# Altium PCB I2C UART Buffer Module.PcbDoc
Units mm, origin at the board's own origin, x right, y up, seen from the top; angles counter-clockwise.
Board outline 35 x 28 mm, 4 copper layers (L1 - Primary, L2 - GND, L3 - GND, L4 - Secondary), stack 1.57 mm thick; 21 components, 26 nets, 78 pads, 45 vias.
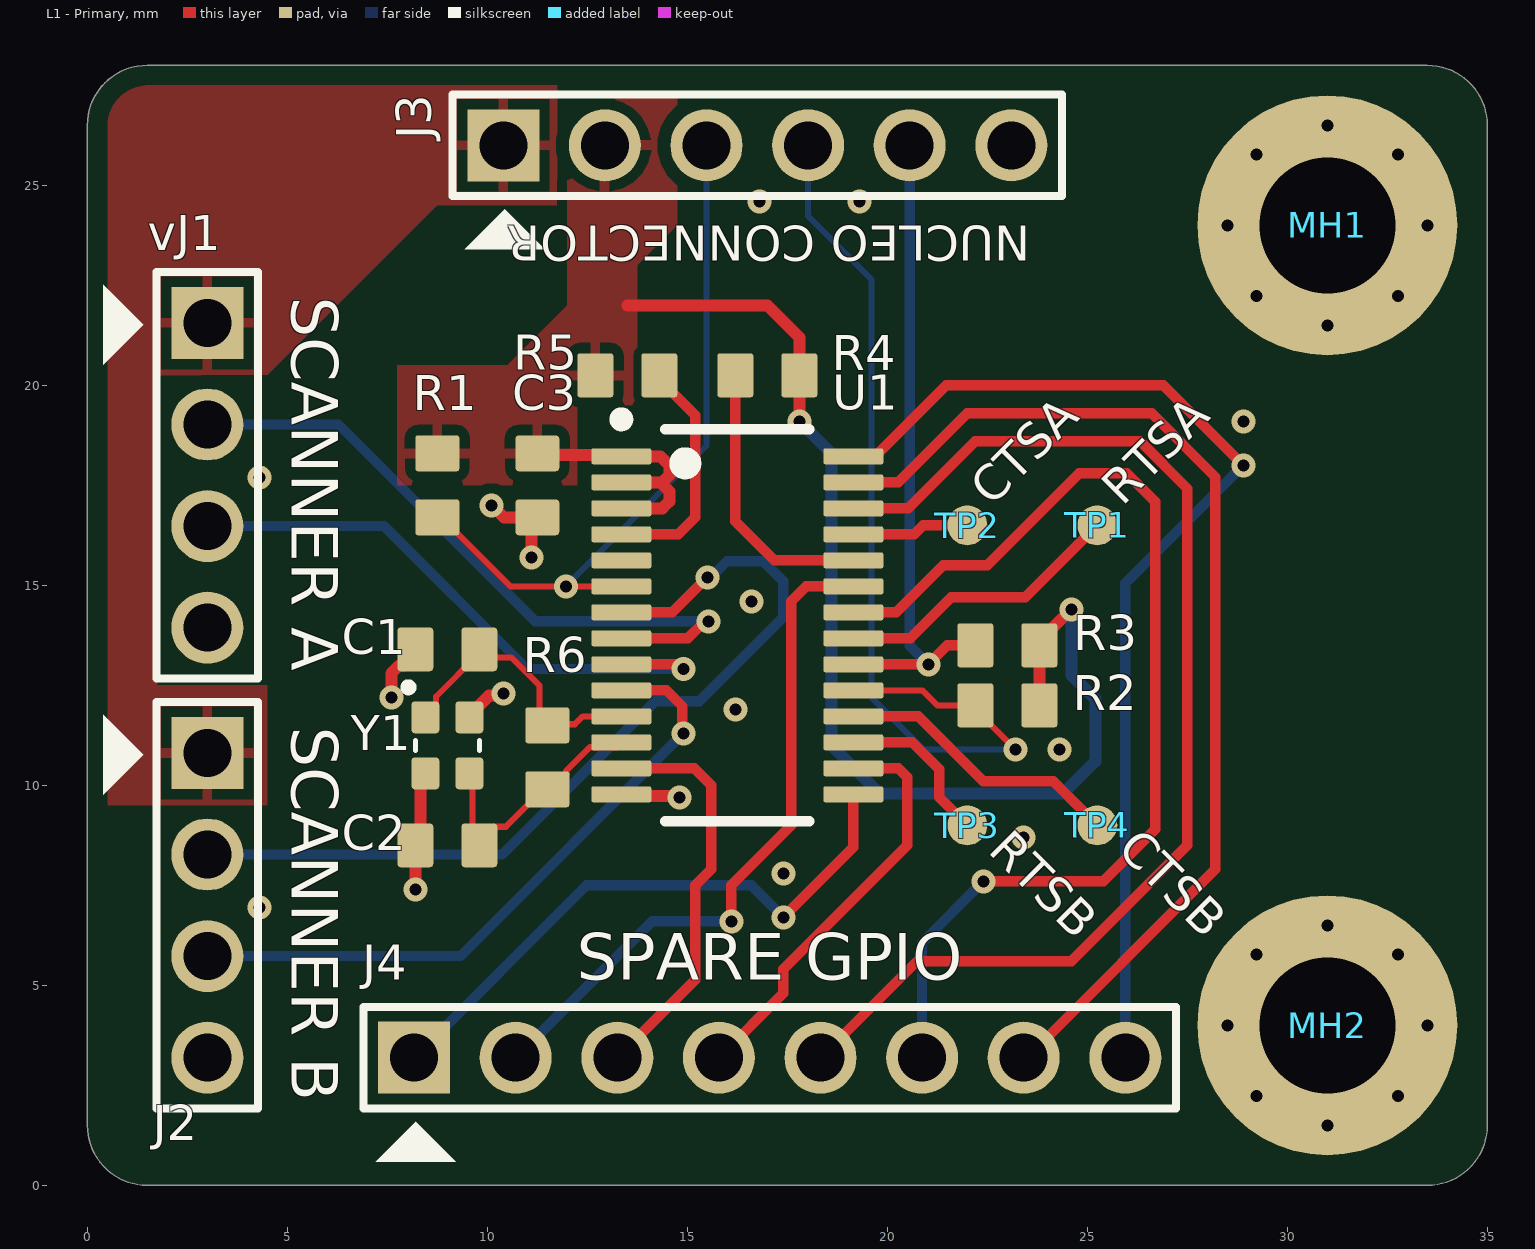
[diagram p0: L1 - Primary view]
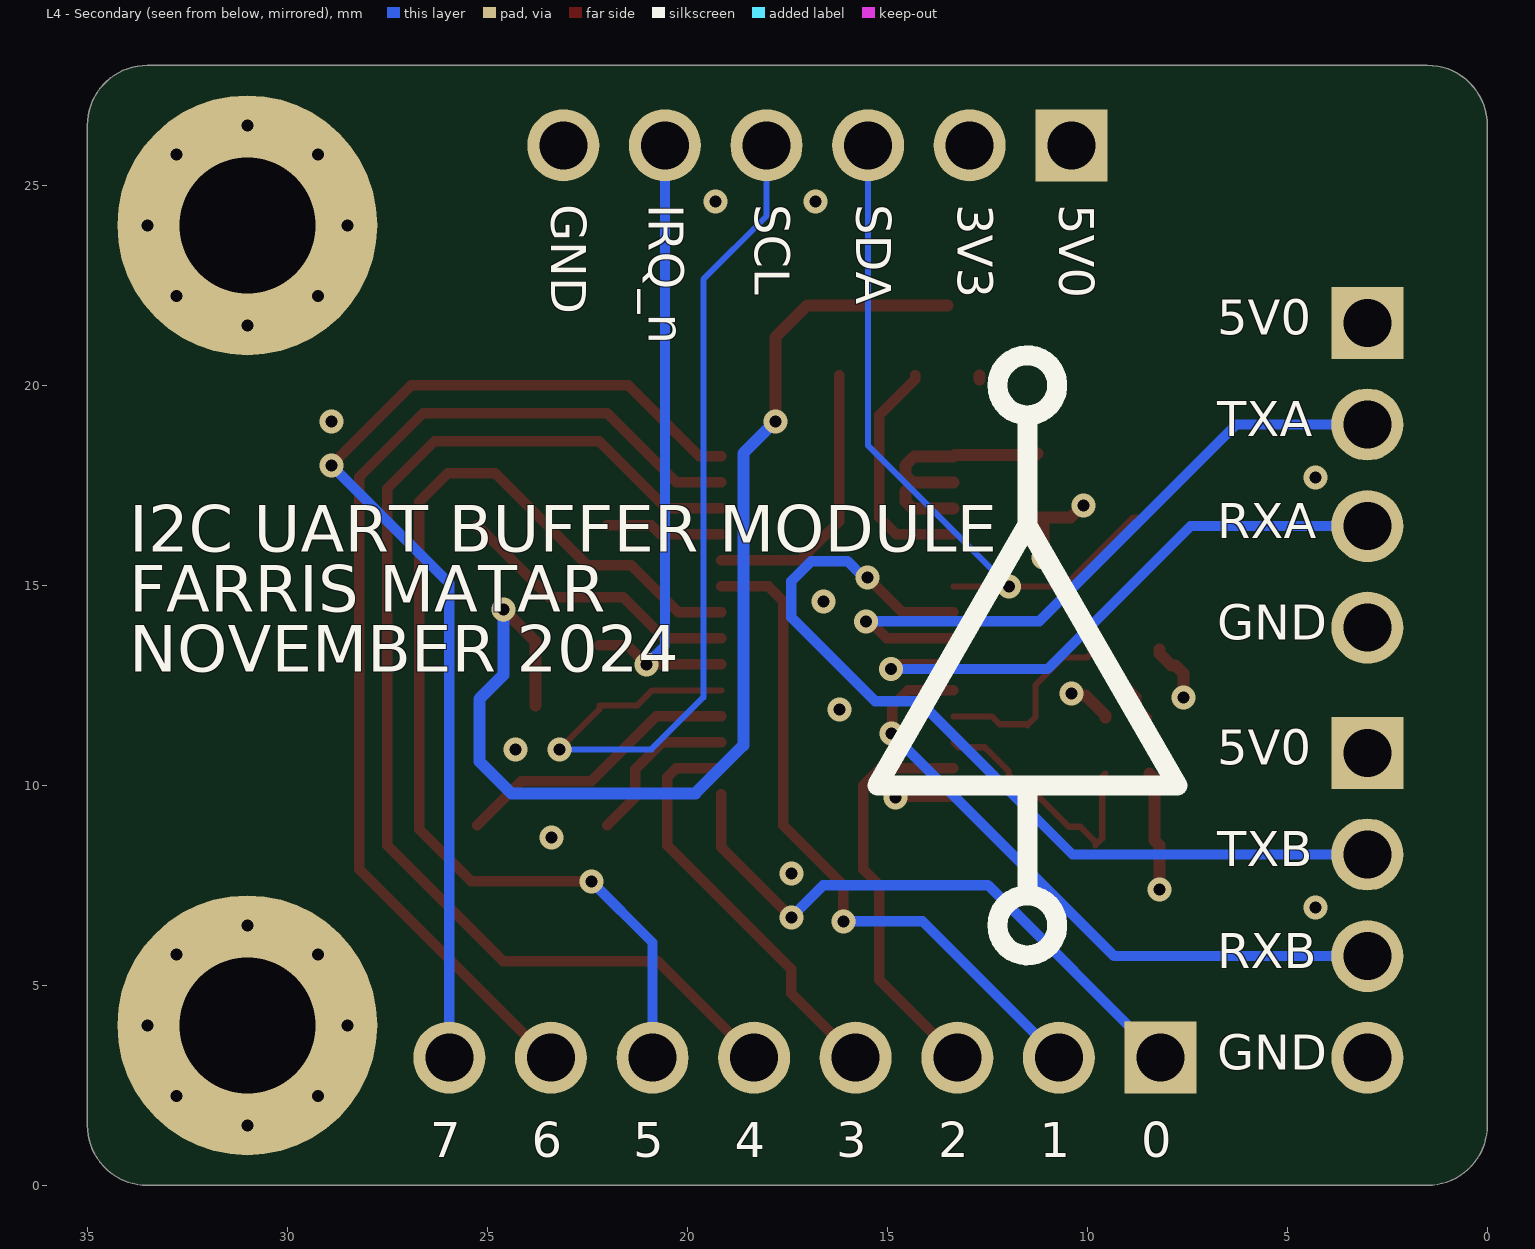
[diagram p1: L4 - Secondary view, seen from below]
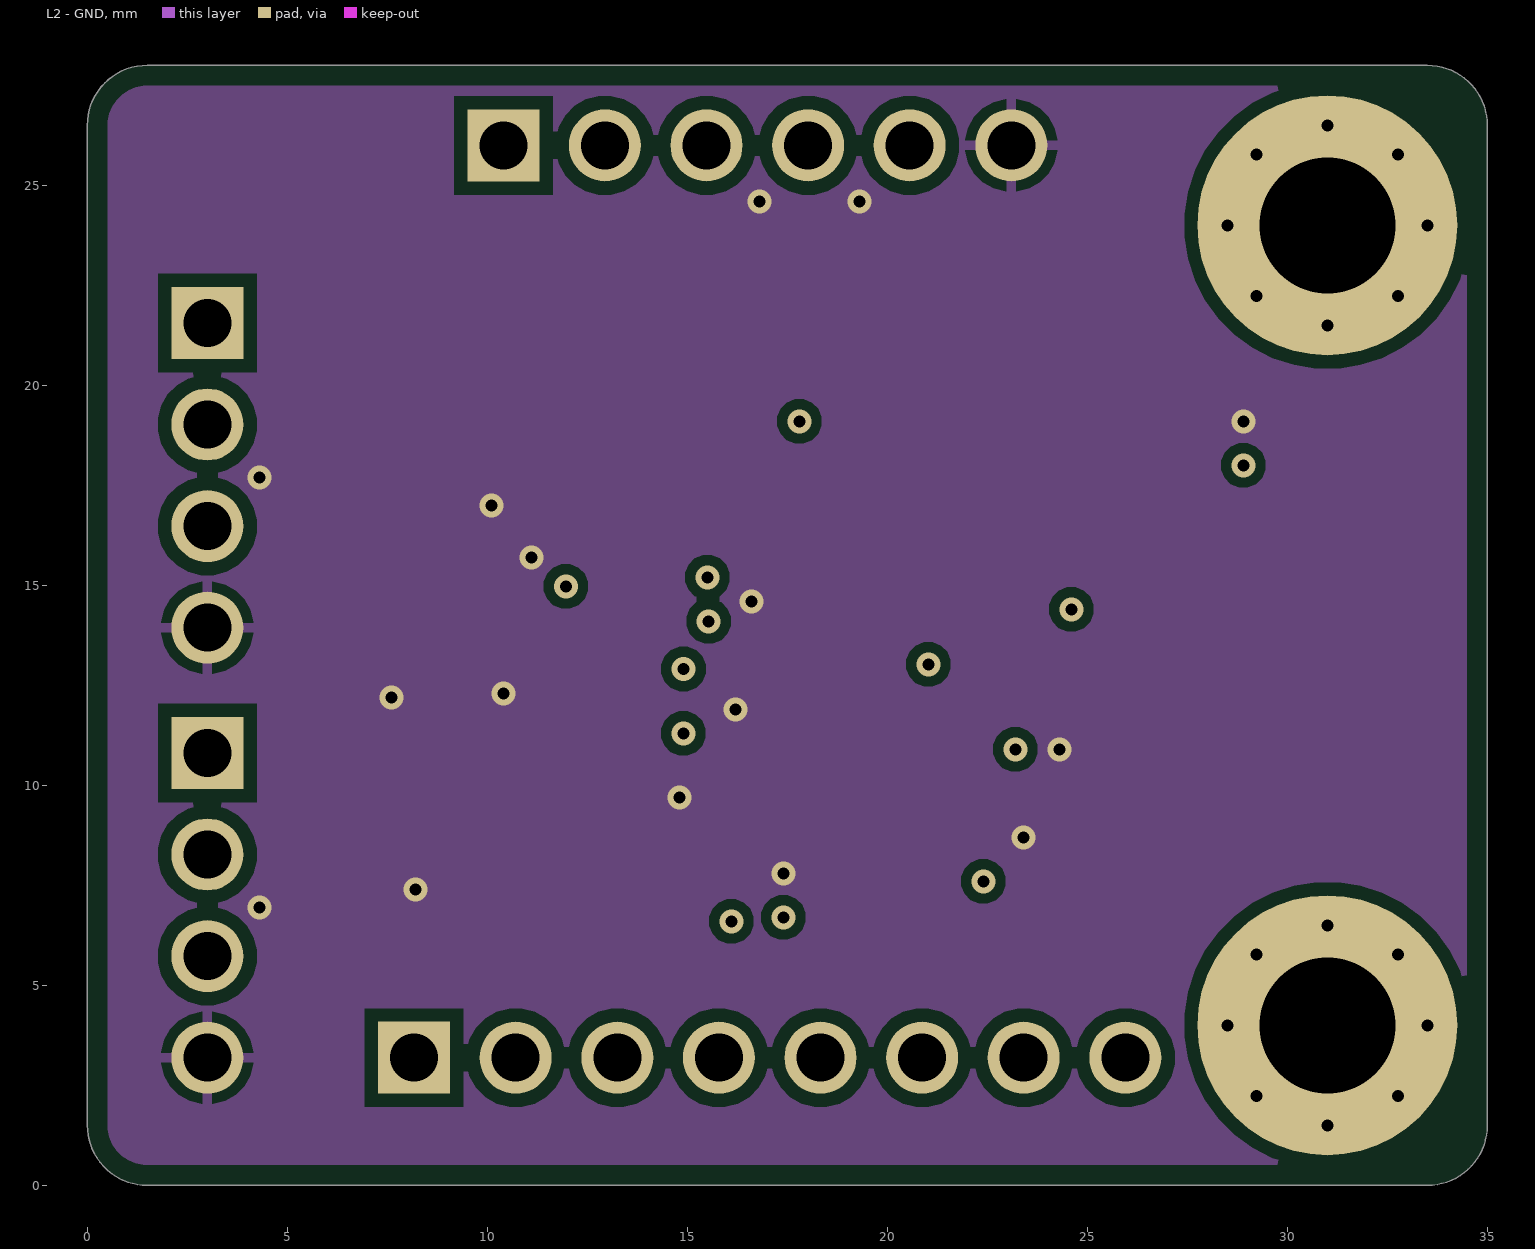
[diagram p2: L2 - GND]
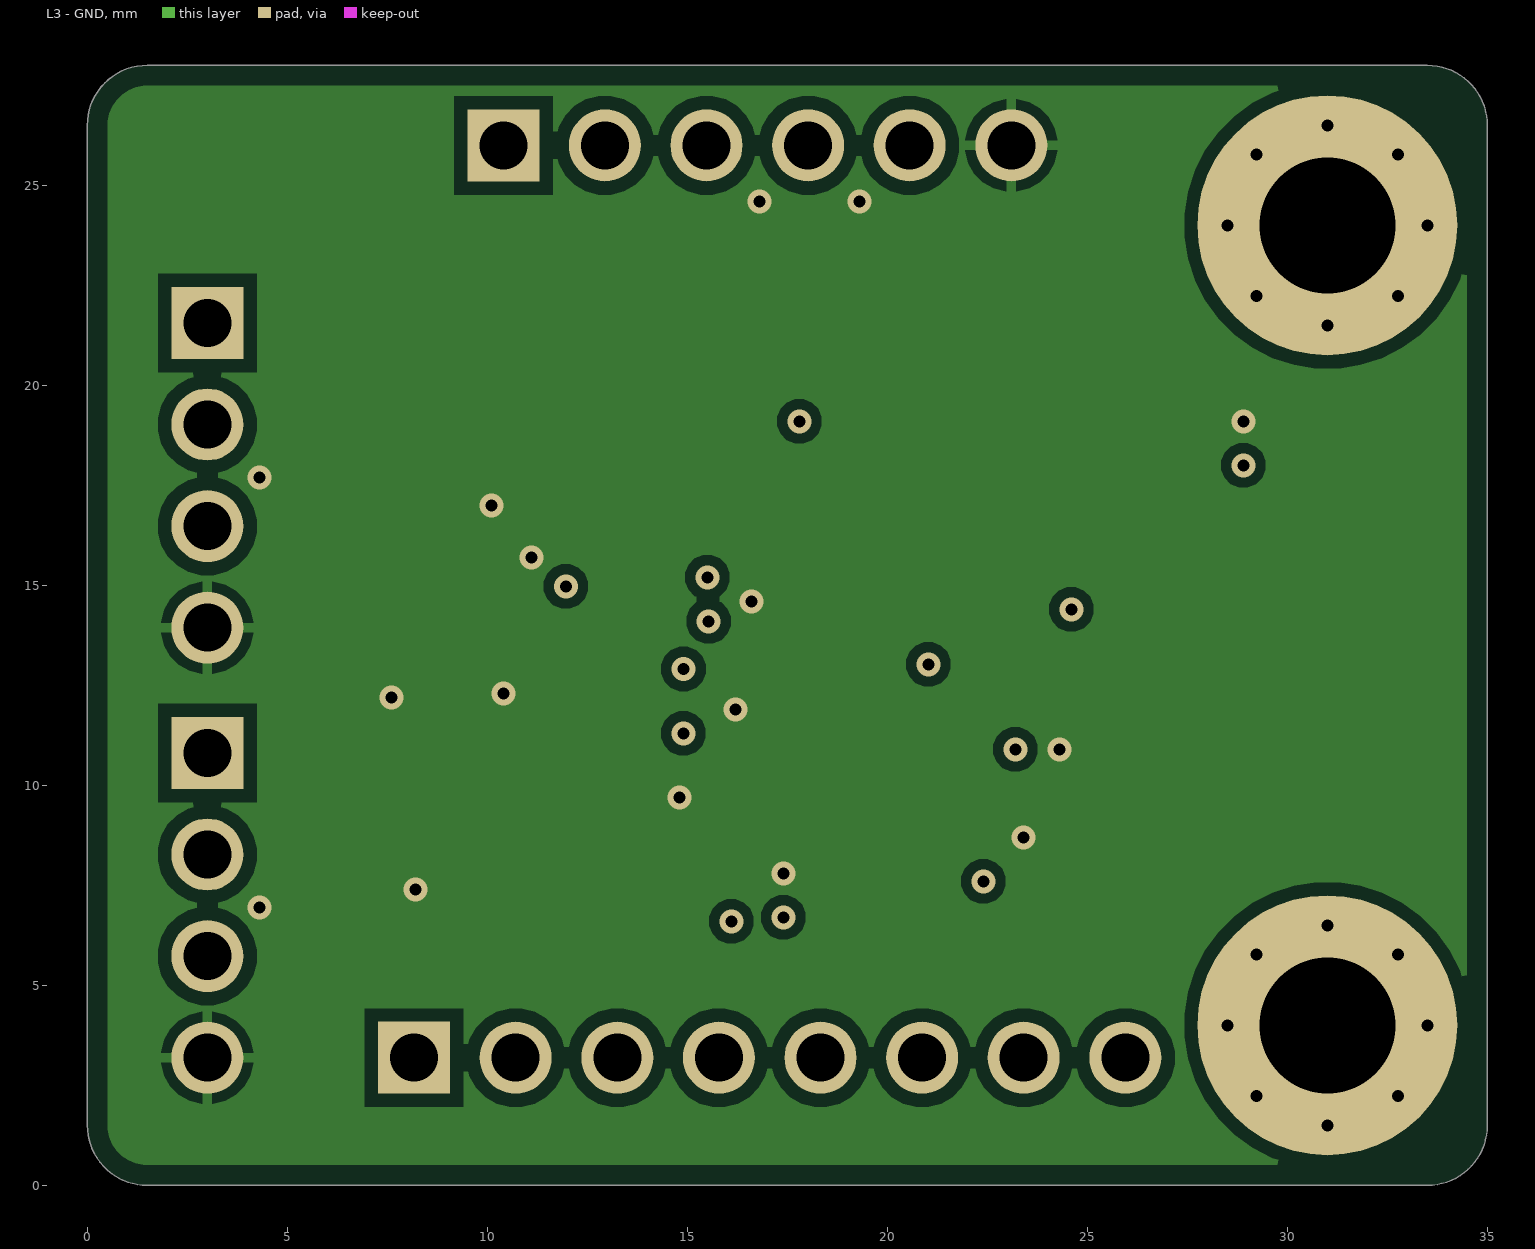
[diagram p3: L3 - GND]
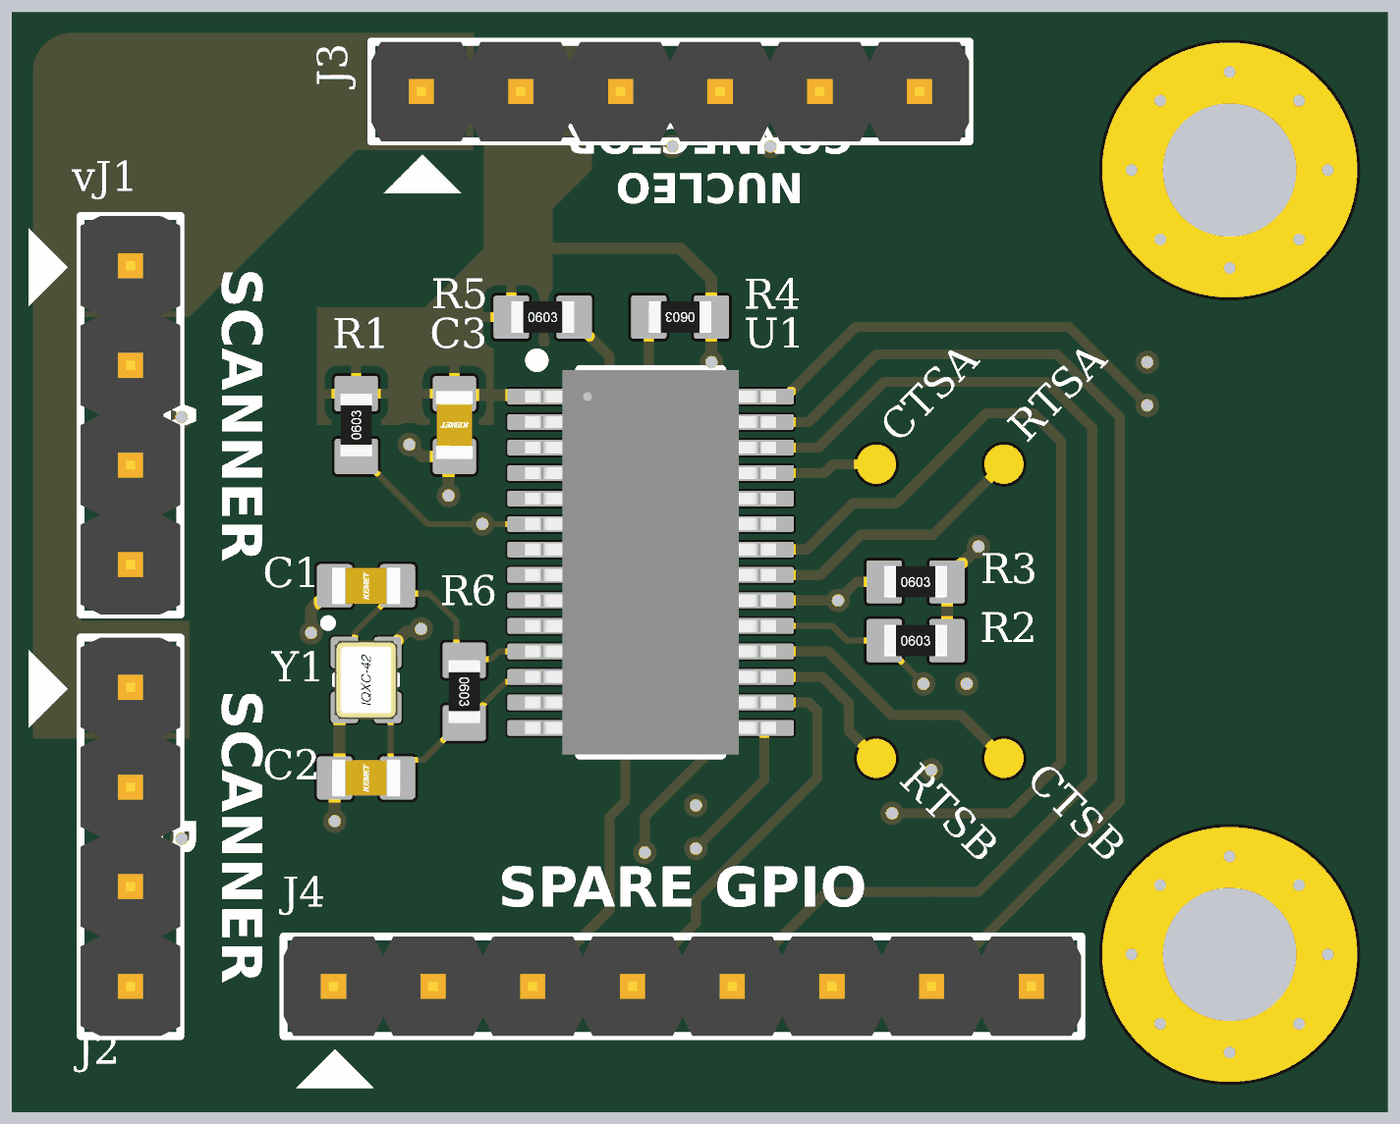
[diagram p4: 3D render of the assembled board from above, using the file's embedded part models]

## Layer stack, top to bottom
Top Solder: solder mask 0.0127, Solder Resist, Dk 3.8
L1 - Primary: signal copper 0.035
Dielectric 1: prepreg 0.2, 7628, Dk 4.6
L2 - GND: signal copper 0.0175
Core: core 1.065, FR-4, Dk 4.5
L3 - GND: signal copper 0.0175
Dielectric 2: prepreg 0.2, 7628, Dk 4.6
L4 - Secondary: signal copper 0.035
Bottom Solder: solder mask 0.0127, Solder Resist, Dk 3.8

## Board outline
0,1.5 ccw(c1.5,1.5) 1.5,0 33.5,0 ccw(c33.5,1.5) 35,1.5 35,26.5 ccw(c33.5,26.5) 33.5,28 1.5,28 ccw(c1.5,26.5) 0,26.5

## Design rules (kind name [scope] priority, off if disabled: settings)
BoardOutlineClearance [All] p1: gap=0.5 ignorepadtopadclearanceinfootprint=FALSE except(0.4: Text-OutlineEdge Text-CavityEdge Text-CutoutEdge Text-SplitBarrior Text-SplitContinuation)
Clearance ClearanceNetTie [HasFootprint('NET_TIE') vs HasFootprint('NET_TIE')] p1: gap=0 ignorepadtopadclearanceinfootprint=FALSE
Clearance ClearanceMidLayer1 [OnLayer('L2 - GND') Or IsVia Or IsThruPin vs OnLayer('L2 - GND')] p2: gap=0.2 ignorepadtopadclearanceinfootprint=FALSE except(0.25: SMDPad-Hole Fill-Hole Poly-Hole Region-Hole Text-Hole; 0.254: Arc-Via Arc-Hole Track-Via Track-Hole Via-Fill Via-Poly Via-Region Fill-Fill Fill-Poly Fill-Region Poly-Poly Poly-Region Region-Region; 0.33: Arc-THPad Track-THPad THPad-Fill THPad-Poly THPad-Region; 0.5: SMDPad-THPad THPad-THPad THPad-Via THPad-Hole Via-Via Via-Hole)
Clearance ClearanceMidLayer2 [OnLayer('L3 - GND') Or IsVia Or IsThruPin vs OnLayer('L3 - GND')] p3: gap=0.2 ignorepadtopadclearanceinfootprint=FALSE except(0.25: SMDPad-Hole Fill-Hole Poly-Hole Region-Hole Text-Hole; 0.254: Arc-Via Arc-Hole Track-Via Track-Hole Via-Fill Via-Poly Via-Region Fill-Fill Fill-Poly Fill-Region Poly-Poly Poly-Region Region-Region; 0.33: Arc-THPad Track-THPad THPad-Fill THPad-Poly THPad-Region; 0.5: SMDPad-THPad THPad-THPad THPad-Via THPad-Hole Via-Via Via-Hole)
Clearance ClearanceTopLayer [OnLayer('L1 - Primary') Or IsVia Or IsThruPin vs OnLayer('L1 - Primary') Or IsVia Or IsThruPin] p4: gap=0.2 ignorepadtopadclearanceinfootprint=FALSE except(0.25: SMDPad-Hole Fill-Hole Poly-Hole Region-Hole Text-Hole; 0.254: Arc-Via Arc-Hole Track-Via Track-Hole Via-Fill Via-Poly Via-Region Fill-Fill Fill-Poly Fill-Region Poly-Poly Poly-Region Region-Region; 0.33: Arc-THPad Track-THPad THPad-Fill THPad-Poly THPad-Region; 0.5: SMDPad-THPad THPad-THPad THPad-Via THPad-Hole Via-Via Via-Hole)
Clearance ClearanceBottomLayer [OnLayer('L4 - Secondary') Or IsVia Or IsThruPin vs OnLayer('L4 - Secondary') Or IsVia Or IsThruPin] p5: gap=0.2 ignorepadtopadclearanceinfootprint=FALSE except(0.25: SMDPad-Hole Fill-Hole Poly-Hole Region-Hole Text-Hole; 0.254: Arc-Via Arc-Hole Track-Via Track-Hole Via-Fill Via-Poly Via-Region Fill-Fill Fill-Poly Fill-Region Poly-Poly Poly-Region Region-Region; 0.33: Arc-THPad Track-THPad THPad-Fill THPad-Poly THPad-Region; 0.5: SMDPad-THPad THPad-THPad THPad-Via THPad-Hole Via-Via Via-Hole)
ComponentClearance [All] p1: gap=0.102 collisioncheckmode=3 verticalgap=0.102 showdistances=TRUE
DiffPairsRouting [All] p1: maxlimit=0.203 minlimit=0.102 mostfreqgap=0.203 toplayer_mingap=0.203 toplayer_minwidth=0.203 toplayer_maxwidth=1816.048 toplayer_prefwidth=0.203 midlayer1_maxgap=0.102 midlayer1_prefgap=0.102 midlayer1_minwidth=0.102 midlayer1_maxwidth=1816.048 midlayer1_prefwidth=0.102 midlayer2_maxgap=0.102 midlayer2_prefgap=0.102 midlayer2_minwidth=0.102 midlayer2_maxwidth=1816.048 midlayer2_prefwidth=0.102 bottomlayer_mingap=0.203 bottomlayer_minwidth=0.203 bottomlayer_maxwidth=1816.048 bottomlayer_prefwidth=0.203 maxuncoupledlength=12.7
Height [All] p1: minheight=0 maxheight=1816.048 prefheight=12.7
HoleSize [All] p1: absolutevalues=TRUE maxlimit=6.3 minlimit=0.2 maxpercent=80.000 minpercent=20.000
HoleToHoleClearance [All] p1: gap=0.25 allowstackedmicrovias=FALSE
MinimumAnnularRing [All] p1: minimumring=0.076
MinimumSolderMaskSliver [All] p1: minsoldermaskwidth=0.1
PolygonConnect PolygonConnect_1 [HasFootprint('TESTPOINT_CIRCLE_1MM') OR HasFootprint('TESTPOINT_SQUARE_1MM')] p1: connectstyle=Direct reliefconductorwidth=0.254 reliefentries=4 polygonreliefangle="90 Angle" airgapwidth=0.254
PolygonConnect [All] p2: thpad.connectstyle=Relief thpad.reliefconductorwidth=0.254 thpad.reliefentries=4 thpad.polygonreliefangle="90 Angle" thpad.airgapwidth=0.254 smdpad.connectstyle=Relief smdpad.reliefconductorwidth=0.254 smdpad.reliefentries=4 smdpad.polygonreliefangle="90 Angle" smdpad.airgapwidth=0.254 via.connectstyle=Direct via.reliefconductorwidth=0.254 via.reliefentries=4 via.polygonreliefangle="90 Angle" via.airgapwidth=0.254
RoutingVias [All] p1: holewidth=0.3 width=0.6 viastyle="Through Hole" minholewidth=0.2 minwidth=0.45 maxholewidth=6.3 maxwidth=6.55
ShortCircuit ShortCircuitNetTie [InNet('CELL_V0') vs InNet('VBAT-')] p1: allowed=TRUE
ShortCircuit [All] p2: allowed=FALSE
SilkToSilkClearance [All] p1: silktosilkclearance=0
SilkToSolderMaskClearance [IsPad] p1: minsilkscreentomaskgap=0.102 clearancetoexposedcopper=TRUE
SolderMaskExpansion [All] p1: expansion=0.075 istentingtop=FALSE
SupplyNets "Schematic Supply Nets_2" [InNet('5V0')] p1: voltage=0.000
SupplyNets "Schematic Supply Nets_1" [InNet('GND')] p2: voltage=0.000
SupplyNets "Schematic Supply Nets" [InNet('3V3')] p3: voltage=0.000
Width [All] p1: maxlimit=1816.048 minlimit=0.152 preferedwidth=0.254
21 further rules are at their usual default settings.

## Classes and differential pairs
component class "Buffer Module": C1 C2 C3 J2 J3 J4 MH1 MH2 R3 R4 R5 R6 TP1 TP2 TP3 TP4 U1 vJ1 Y1

## Components (designator, comment, footprint, x,y, rotation, side; value= is the part's Value field where it differs from the comment)
C1 "CAP_12pF_50V_0603" CAP0603 9,13.4 r0 top value=12pF
C2 "CAP_12pF_50V_0603" CAP0603 9,8.5 r0 top value=12pF
C3 "CAP_0.1uF_16V_0603" CAP0603 11.25,17.5 r90 top value=0.1μF
J2 "HEADER 4x1" HDR1X4 3,7 r270 top
J3 "HEADER 6x1" HDR1X6 16.75,26 r0 top
J4 "HEADER 8x1" HDR1X8 17.06,3.19 r0 top
MH1 "MOUNTING_HOLE_M3" MOUNTING_HOLE_3mm 31,24 r0 top
MH2 "MOUNTING_HOLE_M3" MOUNTING_HOLE_3mm 31,4 r0 top
R1 "RES_1.8kΩ_0603_1%" RES0603 8.75,17.5 r90 top value=1.8kΩ
R2 "RES_1.8kΩ_0603_1%" RES0603 23,12 r0 top value=1.8kΩ
R3 "RES_10kΩ_0603_1%" RES0603 23,13.5 r0 top value=10kΩ
R4 "RES_10kΩ_0603_1%" RES0603 17,20.25 r180 top value=10kΩ
R5 "RES_10kΩ_0603_1%" RES0603 13.5,20.25 r0 top value=10kΩ
R6 "RES_1MΩ_0603_1%" RES0603 11.5,10.7 r270 top value=1MΩ
TP1 "TESTPOINT_1MM_CIRCLE" TESTPOINT_CIRCLE_1MM 25.25,16.5 r270 top
TP2 "TESTPOINT_1MM_CIRCLE" TESTPOINT_CIRCLE_1MM 22,16.5 r270 top
TP3 "TESTPOINT_1MM_CIRCLE" TESTPOINT_CIRCLE_1MM 22,9 r90 top
TP4 "TESTPOINT_1MM_CIRCLE" TESTPOINT_CIRCLE_1MM 25.25,9 r90 top
U1 "XR20M1172IG28-F" MAX_28-TSSOP 16.25,14 r0 top
vJ1 "HEADER 4x1" HDR1X4 3,17.75 r270 top (schematic designator J1)
Y1 "CRYSTAL_25MHZ" XTAL_KYOCERA_CX2016SA 9,11 r270 top

## Footprints (in the part's own frame and the unit in brackets; to place one, negate y for a bottom-side part, rotate by r counter-clockwise, add the part's x,y. Pads: shape width x height; smd on the part's side, far side on the other; paste and mask are expansions set on the pad)
CAP0603 [mm]
  rrect20% 0.9x1.1 smd: 1(-0.8,0) 2(0.8,0)
  body extent -0.88,-0.48 0.87,0.47, height 0.87
HDR1X4 [mm] "Connector; Header; 4 Position"
  rect 1.8x1.8 hole 1.2: 1(-3.81,0)
  round 1.8 hole 1.2: 2(-1.27,0) 3(1.27,0) 4(3.81,0)
  silkscreen extent -5.08,-2.6 5.08,1.27, body extent -5.08,-1.27 5.08,1.27, height 8.55
HDR1X6 [mm] "Connector; Header; 6 Position"
  rect 1.8x1.8 hole 1.2: 1(-6.35,0)
  round 1.8 hole 1.2: 2(-3.81,0) 3(-1.27,0) 4(1.27,0) 5(3.81,0) 6(6.35,0)
  silkscreen extent -7.62,-2.6 7.62,1.27, body extent -7.62,-1.27 7.62,1.27, height 8.57
HDR1X8 [mm] "Connector; Header; 8 Position"
  rect 1.8x1.8 hole 1.2: 1(-8.89,0)
  round 1.8 hole 1.2: 2(-6.35,0) 3(-3.81,0) 4(-1.27,0) 5(1.27,0) 6(3.81,0) 7(6.35,0) 8(8.89,0)
  silkscreen extent -10.16,-2.6 10.16,1.27, body extent -10.16,-1.27 10.16,1.27, height 8.55
MAX_28-TSSOP [mm]
  rrect25% 1.5x0.4 smd mask+0.05: 1(-2.9,4.225) 2(-2.9,3.575) 3(-2.9,2.925) 4(-2.9,2.275) 5(-2.9,1.625) 6(-2.9,0.975) 7(-2.9,0.325) 8(-2.9,-0.325) 9(-2.9,-0.975) 10(-2.9,-1.625) 11(-2.9,-2.275) 12(-2.9,-2.925) 13(-2.9,-3.575) 14(-2.9,-4.225) 15(2.9,-4.225) 16(2.9,-3.575) 17(2.9,-2.925) 18(2.9,-2.275) 19(2.9,-1.625) 20(2.9,-0.975) 21(2.9,-0.325) 22(2.9,0.325) 23(2.9,0.975) 24(2.9,1.625) 25(2.9,2.275) 26(2.9,2.925) 27(2.9,3.575) 28(2.9,4.225)
  silkscreen extent -3.05,-4.9 1.8,5.3, body extent -3.2,-4.9 3.2,4.9, height 1.2
MOUNTING_HOLE_3mm [mm] "3mm Hole"
  round 6.5 hole 3.4: 0(0,0)
RES0603 [mm] "Chip Resistor, Body 1.6x0.8mm, IPC Medium Density"
  rrect15% 0.9x1.1 smd: 1(-0.8,0) 2(0.8,0)
  body extent -0.8,-0.4 0.8,0.4, height 0.46
TESTPOINT_CIRCLE_1MM [mm]
  round 1 smd paste-2539.97: 1(0,0)
XTAL_KYOCERA_CX2016SA [mm]
  rrect25% 0.8x0.7 smd mask+0.05: 1(-0.7,-0.55) 2(0.7,-0.55) 3(0.7,0.55) 4(-0.7,0.55)
  silkscreen extent -1.55,-1.07 0.13,0.8, body extent -1,-0.8 1,0.8, height 0.49

## Part data
C1 C2: "CAP CER 12PF 50V C0G/NP0 0603", Dielectric="C0G, NP0", Manufacturer 1=KEMET, Manufacturer Part Number 1=C0603C120J5GACTU, Package/Footprint=0603, Supplier Part Number 1=399-C0603C120J5GACTUCT-ND, Voltage Rating=50V, Mounting Type=SMD, Supplier 1=Digi-Key
C3: "CAP CER 0.1UF 16V X7R 0603", Dielectric=X7R, Manufacturer 1=Yageo, Manufacturer Part Number 1=CC0603KRX7R7BB104, Package=0603, Supplier Part Number 1=311-1088-1-ND, Voltage Rating=16V, Supplier 1=Digi-Key
J2 vJ1: "CONN HEADER VERT 4POS 2.54MM", Manufacturer 1="Würth Elektronik", Manufacturer Part Number 1=61300411121, Supplier Part Number 1=732-5317-ND, Mounting Type=TH, Pitch=2.54mm, Supplier 1=Digikey
J3: "CONN HEADER VERT 6POS 2.54MM", Manufacturer 1="Würth Elektronik", Manufacturer Part Number 1=61300611121, Supplier Part Number 1=732-5319-ND, Mounting Type=TH, Pitch=2.54mm, Supplier 1=Digi-Key
J4: "CONN HEADER VERT 8POS 2.54MM", Manufacturer 1="Würth Elektronik", Manufacturer Part Number 1=61300811121, Supplier Part Number 1=732-5321-ND, Mounting Type=TH, Pitch=2.54mm, Supplier 1=Digikey
R1 R2: "RES 1.8K OHM 1% 1/10W 0603", Manufacturer 1=Yageo, Manufacturer Part Number 1=RC0603FR-071K8L, Package=0603, Supplier Part Number 1=311-1.80KHRCT-ND, Supplier 1=Digikey
R3 R4 R5: "RES 10K OHM 1% 1/8W 0603", Manufacturer 1="Stackpole Electronics Inc", Manufacturer Part Number 1=RNCP0603FTD10K0, Package=0603, Supplier Part Number 1=RNCP0603FTD10K0CT-ND, Mounting Type=SMD, Supplier 1=Digi-Key
R6: "RES 1M OHM 1% 1/10W 0603", Manufacturer 1=YAGEO, Manufacturer Part Number 1=RC0603FR-071ML, Package=0603, Supplier Part Number 1=311-1.00MHRCT-ND, Mounting Type=SMD, Supplier 1=Digi-Key
TP1 TP2 TP3 TP4: "TESTPOINT 1MM CIRCLE"
U1: "IC UART FIFO I2C/SPI 64B 28TSSOP", Manufacturer 1="MaxLinear, Inc.", Supplier Part Number 1=1016-1298-5-ND, Manufacturer Part Number 1=XR20M1172IG28-F, Supplier 1=Digikey
Y1: library part CRYSTAL_24MHZ_8PF, "2.0MM X 1.6MM CRYSTAL 24MHZ 8PF", Frequency=24MHz, Load Capacitance=8pF, Manufacturer 1="Kyocera AVX", Manufacturer Part Number 1=CX2016SA24000D0HLLG3, Package/Footprint=SMD, Supplier Part Number 1=478-CX2016SA24000D0HLLG3CT-ND, Mounting Type=SMD, Supplier 1=Digikey

## Via types
v1: diameter 0.6, hole 0.3, L1 - Primary to L4 - Secondary, tented both sides, 45 vias

## Nets (pads, with @x,y where several pads share a name; then routed paths per layer and width w, separated by ;. In a path a pad name is that pad's centre, name@x,y a point inside that pad or via, vN(x,y) a via of type N, cw(c..) or ccw(c..) an arc to the next point about the centre after c; other vN are vias at no path point)
3V3: C3.2 J3.2 R1.2 R2.2 R3.2 R4.1 R5.1 U1.1 U1.2 U1.3 | length 36.2
  L1 - Primary w0.3: C3.2 11.288,18.262 13.313,18.262 U1.1 14.325,18.225 14.551,17.999 14.551,17.751 14.375,17.575 ; R5.1@12.7,20.15 R5.1 ; U1.3 14.375,16.925 14.551,17.101 14.551,17.349 14.325,17.575 U1.2 ; 13.5,22 17,22 17.8,21.2 R4.1 v1(17.8,19.1) ; R2.2 23.8,13.6 v1(24.6,14.4)
  L4 - Secondary w0.3: v1(17.8,19.1) 18.6,18.3 18.6,11 19.8,9.8 24.4,9.8 25.2,10.6 25.2,12.159 24.6,12.759 v1(24.6,14.4)
5V0: J2.1 J3.1 vJ1.1
CTSA_n: TP2.1 U1.25 | length 2.9
  L1 - Primary w0.254: U1.25 20.675,16.275 20.9,16.5 TP2.1
CTSB_n: TP4.1 U1.18 | length 7.2
  L1 - Primary w0.254: U1.18 20.775,11.725 22.4,10.1 24.15,10.1 TP4.1
GND: C1.1 C2.1 C3.1 J2.4 J3.6 U1.14 vJ1.4 Y1.2 Y1.4 | length 9.5
  L1 - Primary w0.3: v1(7.6,12.2) 7.6,12.8 7.8,13 7.9,13 8.2,13.3 C1.1 ; v1(8.2,7.4) C2.1 8.325,8.625 8.325,10.175 Y1.2 ; Y1.4 9.55,11.75 10.043,12.243 10.343,12.243 v1(10.4,12.3) ; v1(10.1,17) 10.114,17 10.414,16.7 C3.1 11.1,16.55 v1(11.1,15.7) ; U1.14 13.388,9.738 14.762,9.738 v1(14.8,9.7)
  other v1: 4.3,6.95 17.4,7.8 23.4,8.7 24.3,10.9 16.2,11.9 16.6,14.6 4.3,17.7 28.9,19.1 16.8,24.6 19.3,24.6
GPIO0: J4.1 U1.15 | length 15.1
  L1 - Primary w0.254: v1(17.4,6.7) 19.15,8.45 U1.15
  L4 - Secondary w0.254: J4.1 12.48,7.5 16.6,7.5 v1(17.4,6.7)
GPIO1: J4.2 U1.23 | length 17.1
  L1 - Primary w0.254: v1(16.1,6.6) 16.1,7.5 17.6,9 17.6,14.6 17.975,14.975 U1.23
  L4 - Secondary w0.254: J4.2 14.12,6.6 v1(16.1,6.6)
GPIO2: J4.3 U1.13 | length 10.2
  L1 - Primary w0.254: J4.3 15.2,5.14 15.2,7.5 15.6,7.9 15.6,10 15.175,10.425 U1.13
GPIO3: J4.4 U1.16 | length 10.4
  L1 - Primary w0.254: J4.4 17.4,4.8 17.4,5.4 20.5,8.5 20.5,10.2 20.275,10.425 U1.16
GPIO4: J4.5 U1.26 | length 29.8
  L1 - Primary w0.254: J4.5 20.74,5.6 24.6,5.6 27.5,8.5 27.5,17.42 26.32,18.6 22.2,18.6 20.525,16.925 U1.26
GPIO5: J4.6 U1.22 | length 27.4
  L1 - Primary w0.254: U1.22 20.225,14.325 21.4,15.5 22.5,15.5 24.8,17.8 25.989,17.8 26.7,17.089 26.7,8.9 25.4,7.6 v1(22.4,7.6)
  L4 - Secondary w0.254: J4.6 20.87,6.07 v1(22.4,7.6)
GPIO6: J4.7 U1.27 | length 27
  L1 - Primary w0.254: U1.27 20.275,17.575 22,19.3 26.61,19.3 28.2,17.71 28.2,7.9 23.49,3.19 J4.7
GPIO7: J4.8 U1.28 | length 27.3
  L1 - Primary w0.254: U1.28 19.7,18.225 21.475,20 26.9,20 v1(28.9,18)
  L4 - Secondary w0.254: J4.8 25.95,15.05 v1(28.9,18)
I2C_SCL: J3.4 R2.1 U1.19 | length 23.3
  L1 - Primary w0.152: U1.19 20.875,12.375 21.25,12 R2.1 22.2,11.9 v1(23.2,10.9)
  L4 - Secondary w0.152: J3.4 18.02,24.23 19.6,22.65 19.6,12.2 20.9,10.9 v1(23.2,10.9)
I2C_SDA: J3.3 R1.1 U1.6 | length 17.8
  L1 - Primary w0.152: R1.1 8.85,16.7 10.575,14.975 v1(11.963,14.975) U1.6
  L4 - Secondary w0.152: v1(11.963,14.975) 15.48,18.492 J3.3
IRQ_n: J3.5 R3.1 U1.20 | length 16.4
  L1 - Primary w0.254: U1.20 v1(21.025,13.025) 21.5,13.5 R3.1
  L4 - Secondary w0.254: J3.5 20.56,13.49 v1(21.025,13.025)
NetC1_2: C1.2 R6.1 U1.11 Y1.1 | length 7.2
  L1 - Primary w0.152: Y1.1 8.717,11.967 8.717,12.217 9.8,13.3 C1.2 10,13.2 10.6,13.2 11.3,12.5 11.3,11.7 R6.1 11.526,11.526 12.189,11.526 12.388,11.725 U1.11
NetC2_2: C2.2 R6.2 U1.12 Y1.3 | length 6.6
  L1 - Primary w0.152: Y1.3 9.626,10.224 9.626,8.674 C2.2 9.8,8.593 10.173,8.965 10.465,8.965 11.4,9.9 R6.2 11.6,9.9 11.974,10.274 11.974,10.36 12.565,10.951 13.226,10.951 U1.12
NetR4_2: R4.2 U1.24 | length 7
  L1 - Primary w0.254: R4.2 16.2,16.6 17.175,15.625 U1.24
NetR5_2: R5.2 U1.4 | length 5.9
  L1 - Primary w0.254: U1.4 14.775,16.275 15.2,16.7 15.2,19.25 14.3,20.15 R5.2
RTSA_n: TP1.1 U1.21 | length 7.3
  L1 - Primary w0.254: U1.21 20.575,13.675 21.6,14.7 23.45,14.7 TP1.1
RTSB_n: TP3.1 U1.17 | length 4.1
  L1 - Primary w0.254: U1.17 20.625,11.075 21.3,10.4 21.3,9.7 TP3.1
SCAN_RXA_BUF_TXA: U1.9 vJ1.3 | length 15
  L1 - Primary w0.254: U1.9 14.694,13.025 14.812,12.907 v1(14.906,12.907)
  L4 - Secondary w0.254: vJ1.3 7.42,16.48 10.993,12.907 v1(14.906,12.907)
SCAN_RXB_BUF_TXB: J2.3 U1.10 | length 16.6
  L1 - Primary w0.254: U1.10 14.481,12.375 14.875,11.981 14.875,11.325 v1(14.9,11.3)
  L4 - Secondary w0.254: J2.3 9.33,5.73 v1(14.9,11.3)
SCAN_TXA_BUF_RXA: U1.8 vJ1.2 | length 16.9
  L1 - Primary w0.254: U1.8 15.014,13.675 15.441,14.102 v1(15.535,14.102)
  L4 - Secondary w0.254: vJ1.2 6.28,19.02 11.198,14.102 v1(15.535,14.102)
SCAN_TXB_BUF_RXB: J2.2 U1.7 | length 22.5
  L1 - Primary w0.254: U1.7 14.624,14.325 v1(15.5,15.201)
  L4 - Secondary w0.254: J2.2 10.37,8.27 14.2,12.1 15.3,12.1 17.4,14.2 17.4,15.1 16.9,15.6 15.993,15.6 15.594,15.201 v1(15.5,15.201)
pads on no net: MH1.0 MH2.0 U1.5
copper on no net:
  other v1: 31,1.5 29.232,2.232 32.768,2.232 28.5,4 33.5,4 29.232,5.768 32.768,5.768 31,6.5 31,21.5 29.232,22.232 32.768,22.232 28.5,24 33.5,24 29.232,25.768 32.768,25.768 31,26.5

## Polygon pours and split planes (outlines as drawn)
3V3 on L1 - Primary "3V3_L01_P000" (solid, pour order 0): 12,27.25 14.75,27.25 14.75,24 13.75,23 13.75,19.5 12.25,19.5 12.25,17.5 7.75,17.5 7.75,20.5 10.5,20.5 12,22 12,23
5V0 on L1 - Primary "5V0_L01_P001" (solid, pour order 1): 11.75,27.5 0.25,27.5 0.25,9.5 4.5,9.5 4.5,12.5 1.75,12.5 1.75,20.25 4.5,20.25 8.75,24.5 11.75,24.5
GND on L2 - GND "GND_L02_P002" (solid, remove dead copper, pour order 2): 0,1.5 ccw(c1.5,1.5) 1.5,0 33.5,0 ccw(c33.5,1.5) 35,1.5 35,26.5 ccw(c33.5,26.5) 33.5,28 1.5,28 ccw(c1.5,26.5) 0,26.5
GND on L3 - GND "GND_L03_P003" (solid, remove dead copper, pour order 3): 0,1.5 ccw(c1.5,1.5) 1.5,0 33.5,0 ccw(c33.5,1.5) 35,1.5 35,26.5 ccw(c33.5,26.5) 33.5,28 1.5,28 ccw(c1.5,26.5) 0,26.5

## Silkscreen, mask and mechanical layers (free items; w line width, h text height)
Top Overlay:
  text "NUCLEO CONNECTOR" at 23.569,24.279 h1.5 r180
  text "SCANNER A" at 4.719,22.216 h2 r270
  text "CTSA" at 22.817,16.739 h1.5 r45
  text "RTSA" at 26.085,16.757 h1.5 r45
  text "SCANNER B" at 4.719,11.466 h2 r270
  text "CTSB" at 25.514,8.159 h1.5 r315
  text "RTSB" at 22.282,8.141 h1.5 r315
  text "SPARE GPIO" at 12.232,4.75 h2
Bottom Overlay:
  circle w0.5: c11.5,6.5 r0.75
  circle w0.5: c11.5,20 r0.75
  lines w0.5: 11.5,7.25 11.5,10 ; 11.5,19.25 11.5,16.5 ; 11.5,10 7.75,10 11.5,16.5 ; 11.5,10 15.25,10 ; 11.5,16.5 15.25,10 ; 15.25,10 15.25,10
  text "5V0" at 10.986,24.523 h1.5 r90
  text "3V3" at 13.526,24.523 h1.5 r90
  text "SDA" at 16.066,24.523 h1.5 r90
  text "SCL" at 18.606,24.523 h1.5 r90
  text "IRQ_n" at 21.258,24.528 h1.5 r90
  text "GND" at 23.686,24.523 h1.5 r90
  text "5V0" at 6.75,20.974 h1.5
  text "TXA" at 6.75,18.434 h1.5
  text "RXA" at 6.75,15.894 h1.5
  text "I2C UART BUFFER MODULE" at 33.949,15.456 h2
  text "FARRIS MATAR" at 33.949,13.956 h2
  text "GND" at 6.75,13.354 h1.5
  text "NOVEMBER 2024" at 33.949,12.456 h2
  text "5V0" at 6.75,10.224 h1.5
  text "TXB" at 6.75,7.684 h1.5
  text "RXB" at 6.75,5.144 h1.5
  text "GND" at 6.75,2.604 h1.5
  text "0" at 8.652,0.414 h1.5
  text "1" at 11.192,0.414 h1.5
  text "2" at 13.732,0.414 h1.5
  text "3" at 16.272,0.414 h1.5
  text "4" at 18.812,0.414 h1.5
  text "5" at 21.352,0.414 h1.5
  text "6" at 23.892,0.414 h1.5
  text "7" at 26.432,0.414 h1.5
Mechanical 1:
  the board outline again, w0.254